# Allegro board Anlogic Eagle FPGA E104接口.brd
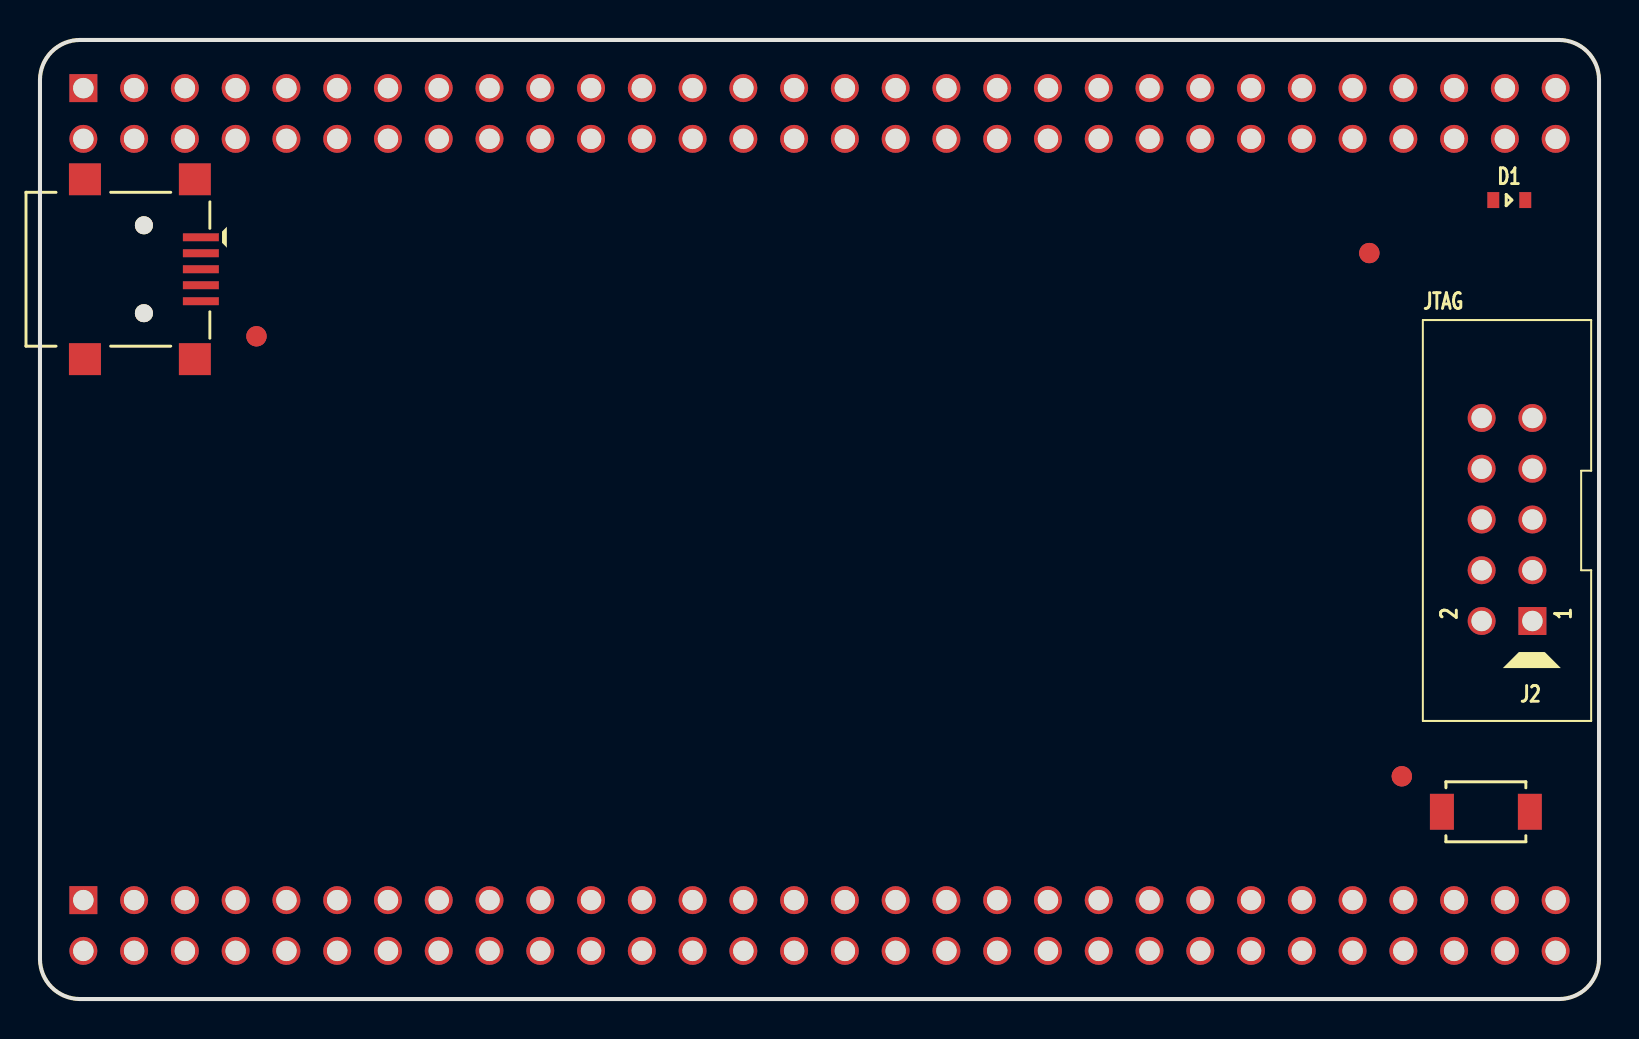
[diagram p0: board, top side]
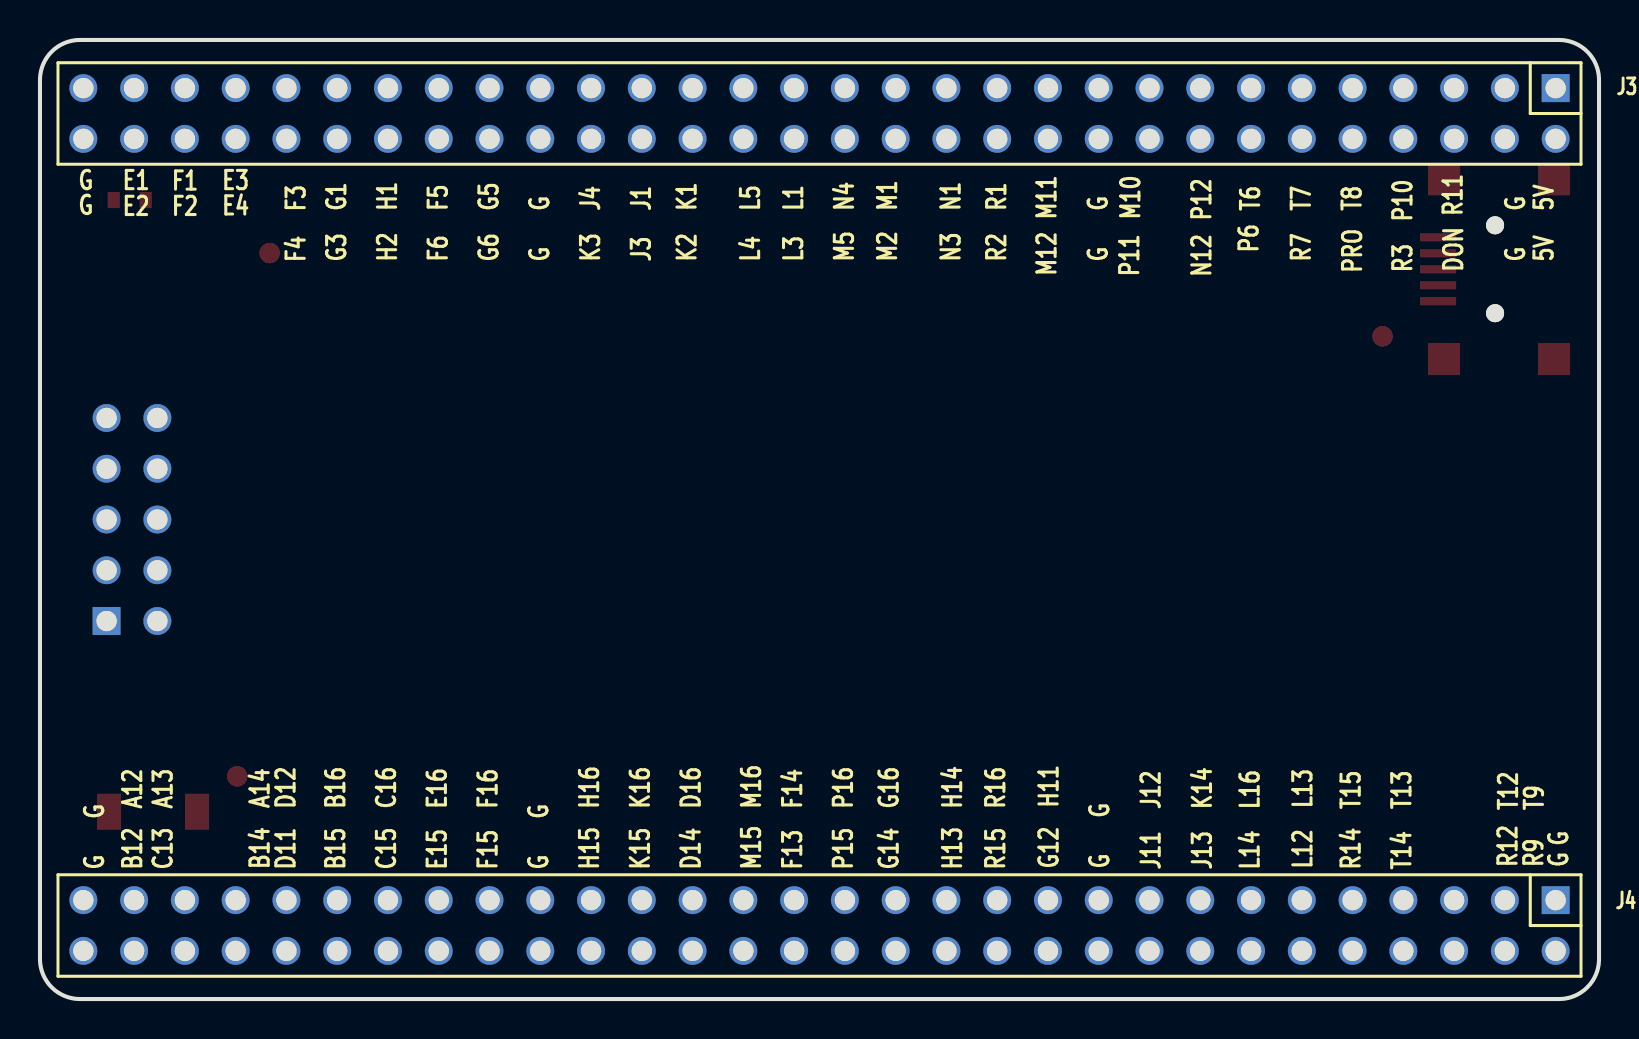
[diagram p1: board, bottom side, seen from below]

Outline 78 x 48 mm; copper layers: TOP, BOTTOM. Coordinates in mm from the lower left corner of the outline.
Outline path: 0,46 arc(0.59,47.41) 2,48 76,48 arc(77.41,47.41) 78,46 78,2 arc(77.41,0.59) 76,0 2,0 arc(0.59,0.59) 0,2 0,46

## Design rules (mm)
net group DP_L2_3: nets M5_R2P_3 N4_R2N_3
net group DP_L23_2: nets R9_TE8P_2 T9_TE8N_2
net group DP_L29_1: nets B15_L2P_1 B16_L2N_1
net group DP_L31_1: nets D14_L4P_1 D16_L4N_1
net group DP_L32_1: nets F13_L5P_1 F14_L5N_1
net group DP_L32_2: nets R7_TE12P_GCLKIOT5_2 T7_TE12N_GCLKIOT4_2
net group DP_L33_1: nets C15_L6P_1 C16_L6N_1
net group DP_L33_3: nets R1_R3N_GPLL2_CLKIN1_3 R2_R3P_GPLL2_CLKIN0_3
net group DP_L34_1: nets E15_L7P_1 E16_L7N_1
net group DP_L34_3: nets N1_R5N_3 N3_R5P_3
net group DP_L35_1: nets F15_L8P_1 F16_L8N_1
net group DP_L35_3: nets M1_R6N_3 M2_R6P_3
net group DP_L36_1: nets G14_L9P_1 G16_L9N_1
net group DP_L36_3: nets L1_R7N_3 L3_R7P_3
net group DP_L37_1: nets H15_L10P_1 H16_L10N_1
net group DP_L37_3: nets K1_R8N_3 K2_R8P_3
net group DP_L38_1: nets G12_L11P_1 H11_L11N_1
net group DP_L38_3: nets J1_R9N_3 J3_R9P_3
net group DP_L39_1: nets H13_L12P_1 H14_L12N_1
net group DP_L39_3: nets H1_R10N_3 H2_R10P_3
net group DP_L40_1: nets J11_L13P_GCLKIOL7_1 J12_L13N_GCLKIOL6_1
net group DP_L40_3: nets G1_R11N_3 G3_R11P_3
net group DP_L41_1: nets J13_L14P_GCLKIOL5_1 K14_L14N_GCLKIOL4_1
net group DP_L41_GCLK_3: nets F1_R12N_GCLKIOR6_3 F2_R12P_GCLKIOR7_3
net group DP_L42_GCLK_3: nets J4_R13N_GCLKIOR4_3 K3_R13P_GCLKIOR5_3
net group DP_L44_1: nets K15_L17P_1 K16_L17N_1
net group DP_L45_3: nets L4_R16P_3 L5_R16N_3
net group DP_L46_1: nets M15_L19P_1 M16_L19N_1
net group DP_L46_3: nets E1_R17N_3 E2_R17P_3
net group DP_L47_1: nets L14_L20P_1 L16_L20N_1
net group DP_L47_2: nets P6_TE13P_2 T6_TE13N_2
net group DP_L48_1: nets P15_L21P_1 P16_L21N_1
net group DP_L49_1: nets R15_L22P_1 R16_L22N_1
net group DP_L49_2: nets M11_TE2N_PLL_ADC_CH7_2 M12_TE2P_PLL_ADC_CH4_2
net group DP_L50_1: nets R14_L23P_1 T15_L23N_1
net group DP_L51_1: nets T13_L24N_1 T14_L24P_1
net group DP_L51_3: nets G5_R22N_3 G6_R22P_3
net group DP_L52_1: nets R12_L25P_1 T12_L25N_1
net group DP_L53_3: nets F3_R24N_3 F4_R24P_3
net group DP_L54_3: nets E3_R25N_3 E4_R25P_3
net group DP_L55_3: nets F5_R26N_3 F6_R26P_3
net group DP_L62_0: nets A12_BE16N_0 B12_BE16P_0
net group DP_L63_0: nets A13_BE17N_0 C13_BE17P_0
net group DP_L65_0: nets A14_BE19N_GPLL0_CLKIN1_0 B14_BE19P_GPLL0_CLKIN0_0
net group DP_L66_0: nets D11_BE20P_GPLL0_OUTP_0 D12_BE20N_GPLL0_OUTN_0
net group DP_L74_1: nets L12_L26P_1 L13_L26N_1
net group NG_CONFIG: nets +5V DONE_2 P10_IO_DIN_MISO_2 PROGRAM_B_2 R3_IO_INIT_B_2 R11_IO_CCLK_2
net group NG_J3: nets M10_IO_ADC_CH3_2 P11_IO_ADC_CH2_2 T8_IO_GCLKIOT0_2

## Placement (name value [footprint] x y rotation side)
D1  GREEN  [Q0603]  73.51 39.99 0 top
J1  MINI USB  [MINIUSB-AB-SM]  -0.7 36.52 270 top
J2  CONN 5x2  [DIP10-2P54-I]  74.67 18.92 90 top
J3  CONN PLUG 30x2  [DIP2X30_2P54]  2.17 45.59 0 bottom
J4  CONN PLUG 30x2  [DIP2X30_2P54]  2.17 4.95 0 bottom
NOREF  -  [unnamed]  66.51 37.34 0 top
NOREF#2  -  [unnamed]  68.13 11.15 0 top
NOREF#3  -  [unnamed]  10.83 33.17 0 top
S1  FSMRA2JH  [SMD_3X4X2MM]  72.34 9.37 0 top

## Library data of the parts
D1 = LED: room: POWER
J1 = USB_MINI_AB_RECEPTACLE: Tolerance: #TOL; User Part Number: HAMP
J2 = CONN RCPT 5x2/SM_0
J3 J4 = CONN PLUG 30x2
S1 = SWITCH_2: User Part Number: partnum; Tolerance: RichardLC; room: CPU

## Footprints (pads in the part's own frame, mm; a bottom-side part is the same pattern mirrored in y, then rotated)
DIP2X30_2P54
  rect 1.4x1.4 hole 1.021: 1(0,0)
  round 1.4 hole 1.021: 2(0,2.54) 3(2.54,0) 4(2.54,2.54) 5(5.08,0) 6(5.08,2.54) 7(7.62,0) 8(7.62,2.54) 9(10.16,0) 10(10.16,2.54) 11(12.7,0) 12(12.7,2.54) 13(15.24,0) 14(15.24,2.54) 15(17.78,0) 16(17.78,2.54) 17(20.32,0) 18(20.32,2.54) 19(22.86,0) 20(22.86,2.54) 21(25.4,0) 22(25.4,2.54) 23(27.94,0) 24(27.94,2.54) 25(30.48,0) 26(30.48,2.54) 27(33.02,0) 28(33.02,2.54) 29(35.56,0) 30(35.56,2.54) 31(38.1,0) 32(38.1,2.54) 33(40.64,0) 34(40.64,2.54) 35(43.18,0) 36(43.18,2.54) 37(45.72,0) 38(45.72,2.54) 39(48.26,0) 40(48.26,2.54) 41(50.8,0) 42(50.8,2.54) 43(53.34,0) 44(53.34,2.54) 45(55.88,0) 46(55.88,2.54) 47(58.42,0) 48(58.42,2.54) 49(60.96,0) 50(60.96,2.54) 51(63.5,0) 52(63.5,2.54) 53(66.04,0) 54(66.04,2.54) 55(68.58,0) 56(68.58,2.54) 57(71.12,0) 58(71.12,2.54) 59(73.66,0) 60(73.66,2.54)
DIP10-2P54-I
  rect 1.4x1.4 hole 1.021: 1(0,0)
  round 1.4 hole 1.021: 2(0,2.54) 3(2.54,0) 4(2.54,2.54) 5(5.08,0) 6(5.08,2.54) 7(7.62,0) 8(7.62,2.54) 9(10.16,0) 10(10.16,2.54)
MINIUSB-AB-SM
  round 0.9 hole 0.9 unplated: (-2.2,5.9) (2.2,5.9)
  rect 0.4x1.8 smd: 1(-1.6,8.75) 2(-0.8,8.75) 3(0,8.75) 4(0.8,8.75) 5(1.6,8.75)
  rect 1.6x1.6 smd: S1(-4.5,8.45) S2(4.5,8.45) S3(-4.5,2.95) S4(4.5,2.95)
Q0603
  rect 0.6x0.8 smd: 1(-0.8,0) 2(0.8,0)
SMD_3X4X2MM
  rect 1.2x1.8 smd: 1(-2.2,0) 2(2.2,0)
unnamed
  round 1.016 smd: (0,0) (0,0)

## Nets
+5V: J3.1 J3.2
GND: J2.2(GND#2) J2.10(GND#10) J3.3 J3.4 J3.19 J3.20 J3.41 J3.42 J3.59 J3.60 J4.1 J4.2 J4.19 J4.20 J4.41 J4.42 J4.59 J4.60
VCC: J2.4(VCC)
A12_BE16N_0: J4.57
A13_BE17N_0: J4.55
A14_BE19N_GPLL0_CLKIN1_0: J4.53
B12_BE16P_0: J4.58
B14_BE19P_GPLL0_CLKIN0_0: J4.54
B15_L2P_1: J4.50
B16_L2N_1: J4.49
C13_BE17P_0: J4.56
C15_L6P_1: J4.48
C16_L6N_1: J4.47
D11_BE20P_GPLL0_OUTP_0: J4.52
D12_BE20N_GPLL0_OUTN_0: J4.51
D14_L4P_1: J4.36
D16_L4N_1: J4.35
DONE_2: J3.6
E1_R17N_3: J3.57
E2_R17P_3: J3.58
E3_R25N_3: J3.53
E4_R25P_3: J3.54
E15_L7P_1: J4.46
E16_L7N_1: J4.45
F1_R12N_GCLKIOR6_3: J3.55
F2_R12P_GCLKIOR7_3: J3.56
F3_R24N_3: J3.51
F4_R24P_3: J3.52
F5_R26N_3: J3.45
F6_R26P_3: J3.46
F13_L5P_1: J4.32
F14_L5N_1: J4.31
F15_L8P_1: J4.44
F16_L8N_1: J4.43
G1_R11N_3: J3.49
G3_R11P_3: J3.50
G5_R22N_3: J3.43
G6_R22P_3: J3.44
G12_L11P_1: J4.22
G14_L9P_1: J4.28
G16_L9N_1: J4.27
H1_R10N_3: J3.47
H2_R10P_3: J3.48
H11_L11N_1: J4.21
H13_L12P_1: J4.26
H14_L12N_1: J4.25
H15_L10P_1: J4.40
H16_L10N_1: J4.39
J1_R9N_3: J3.37
J3_R9P_3: J3.38
J4_R13N_GCLKIOR4_3: J3.39
J11_L13P_GCLKIOL7_1: J4.18
J12_L13N_GCLKIOL6_1: J4.17
J13_L14P_GCLKIOL5_1: J4.16
K1_R8N_3: J3.35
K2_R8P_3: J3.36
K3_R13P_GCLKIOR5_3: J3.40
K14_L14N_GCLKIOL4_1: J4.15
K15_L17P_1: J4.38
K16_L17N_1: J4.37
L1_R7N_3: J3.31
L3_R7P_3: J3.32
L4_R16P_3: J3.34
L5_R16N_3: J3.33
L12_L26P_1: J4.12
L13_L26N_1: J4.11
L14_L20P_1: J4.14
L16_L20N_1: J4.13
M1_R6N_3: J3.27
M2_R6P_3: J3.28
M5_R2P_3: J3.30
M10_IO_ADC_CH3_2: J3.17
M11_TE2N_PLL_ADC_CH7_2: J3.21
M12_TE2P_PLL_ADC_CH4_2: J3.22
M15_L19P_1: J4.34
M16_L19N_1: J4.33
N1_R5N_3: J3.25
N3_R5P_3: J3.26
N4_R2N_3: J3.29
N12_TE4P_ADC_CH5_2: J3.16
P6_TE13P_2: J3.14
P10_IO_DIN_MISO_2: J3.7
P11_IO_ADC_CH2_2: J3.18
P12_TE4N_ADC_CH6_2: J3.15
P15_L21P_1: J4.30
P16_L21N_1: J4.29
PROGRAM_B_2: J3.10
R1_R3N_GPLL2_CLKIN1_3: J3.23
R2_R3P_GPLL2_CLKIN0_3: J3.24
R3_IO_INIT_B_2: J3.8
R7_TE12P_GCLKIOT5_2: J3.12
R9_TE8P_2: J4.4
R11_IO_CCLK_2: J3.5
R12_L25P_1: J4.6
R14_L23P_1: J4.10
R15_L22P_1: J4.24
R16_L22N_1: J4.23
T6_TE13N_2: J3.13
T7_TE12N_GCLKIOT4_2: J3.11
T8_IO_GCLKIOT0_2: J3.9
T9_TE8N_2: J4.3
T12_L25N_1: J4.5
T13_L24N_1: J4.7
T14_L24P_1: J4.8
T15_L23N_1: J4.9

Pads without a net: D1 1 2; J1 1 2 3 4 5 S1 S2 S3 S4; J2 1 3 5 6 7 8 9; S1 1 2

## Text on the board
Ref Des/Silkscreen Bottom: E3 | E4 | F1 | F2 | E1 | E2 | G | 5V | T9 | R9 | T12 | R12 | DON | R11 | P10 | R3 | T13 | T14 | PRO | T8 | T15 | R14 | L13 | L12 | T7 | R7 | T6 | L16 | L14 | P6 | K14 | J13 | P12 | N12 | J12 | J11 | M10 | P11 | H11 | G12 | M11 | M12 | R1 | R2 | R16 | R15 | H14 | H13 | N1 | N3 | G16 | G14 | M1 | M2 | N4 | M5 | P16 | P15 | L1 | L3 | F14 | F13 | M16 | M15 | L5 | L4 | D16 | D14 | K1 | K2 | J1 | J3 | K16 | K15 | J4 | K3 | H16 | H15 | G5 | G6 | F16 | F15 | F5 | F6 | E16 | E15 | H1 | H2 | C16 | C15 | G1 | G3 | B16 | B15 | F3 | F4 | D12 | D11 | A14 | B14 | A13 | C13 | A12 | B12
Ref Des/Silkscreen Top: JTAG
PAGE_OUTLINE: A | B | C | PRINTED WIRING BOARD
User.7: FIGURE | SIZE | 10.0 | 40.2 | 35.43 | 55.12x23.62 | DRILL CHART: TOP to BOTTOM | ALL UNITS ARE IN MILS | TOLERANCE | +0.0/-0.0 | +1.97/-1.97 | PLATED | NON-PLATED | QTY | 339 | 134 | 2 | 5
